# Allegro board XR808ST0_REF2_SIMPLE_V1_0-20191018.brd
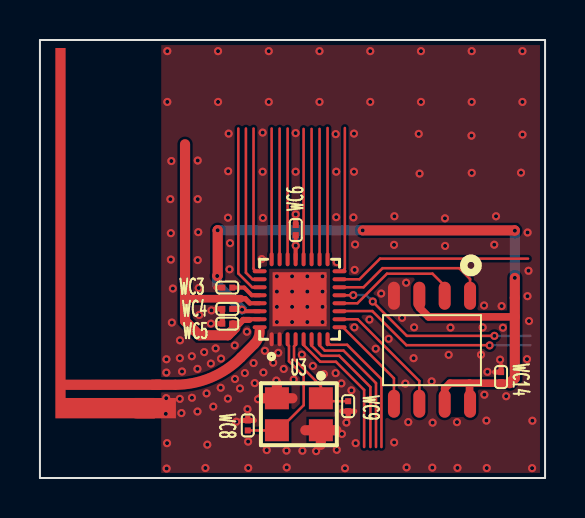
[diagram p0: board, top side]
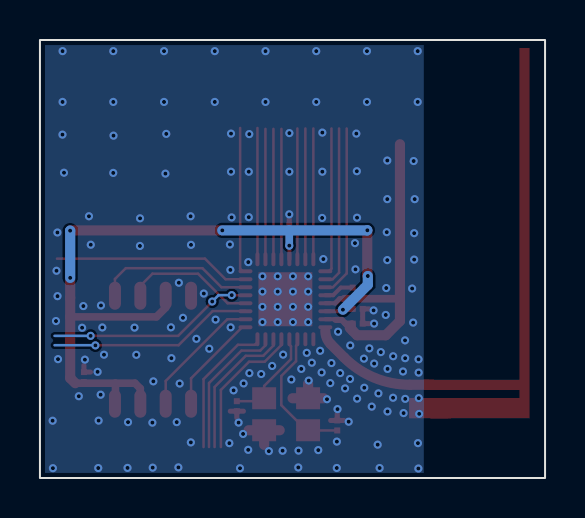
[diagram p1: board, bottom side, seen from below]

Outline 25.29 x 21.9 mm; copper layers: TOP, BOTTOM. Coordinates in mm from the lower left corner of the outline.
Outline path: rectangle 0,0 25.29,21.9

## Placement (name value [footprint] x y rotation side)
JW1  ANT-F  [ANT2B18_54X5_30]  5.82 4.66 90 top
U1  XR808ST  [QFN32P0_4B4_00X4_00H0_75]  13 8.94 90 top
U3  40MHz-E3SB40MHz  [CRY-TSX3225]  12.96 3.19 270 top
U4  SPI_NOR_16Mb  [SOP8_150MIL]  19.63 6.39 270 top
WC3  1uF  [C0201]  9.38 9.52 0 top
WC4  1uF  [C0201]  9.38 8.46 180 top
WC5  1uF  [C0201]  9.38 7.72 180 top
WC6  NC-104  [C0201]  12.81 12.4 90 top
WC8  NC-10pF  [C0201]  10.4 2.63 270 top
WC9  NC-10pF  [C0201]  15.43 3.59 270 top
WC14  NC-104  [C0201]  23.09 5.05 270 top

## Library data of the parts
JW1 = ANT-F_1
U1 = XR808ST0
U3 = Crystal4Pin_0
U4 = SPI-NOR-SO8
WC3-WC6 WC9 = CAPACITOR
WC8 WC14 = CAPACITOR_0

## Footprints (pads in the part's own frame, mm; a bottom-side part is the same pattern mirrored in y, then rotated)
ANT2B18_54X5_30
  rect 1.016x1.016 smd: 1(-1.168,0.577)
  rect 0.508x0.508 smd: 2(0,0)
C0201
  rect 0.3x0.3 smd: 1(-0.25,0) 2(0.25,0)
CRY-TSX3225
  rect 1.1x1.2 smd: 1(-0.8,1.1) 2(-0.8,-1.1) 3(0.8,-1.1) 4(0.8,1.1)
QFN32P0_4B4_00X4_00H0_75
  oval 0.7x0.2 smd: 1(-2,1.4) 2(-2,1) 3(-2,0.6) 4(-2,0.2) 5(-2,-0.2) 6(-2,-0.6) 7(-2,-1) 8(-2,-1.4) 17(2,-1.4) 18(2,-1) 19(2,-0.6) 20(2,-0.2) 21(2,0.2) 22(2,0.6) 23(2,1) 24(2,1.4)
  oval 0.2x0.7 smd: 9(-1.4,-2) 10(-1,-2) 11(-0.6,-2) 12(-0.2,-2) 13(0.2,-2) 14(0.6,-2) 15(1,-2) 16(1.4,-2) 25(1.4,2) 26(1,2) 27(0.6,2) 28(0.2,2) 29(-0.2,2) 30(-0.6,2) 31(-1,2) 32(-1.4,2)
  rect 2.7x2.7 smd: 33(0,0)
SOP8_150MIL
  oval 1.4x0.6 smd: 1(-2.725,1.905) 2(-2.725,0.635) 3(-2.725,-0.635) 4(-2.725,-1.905) 5(2.675,-1.905) 6(2.675,-0.635) 7(2.675,0.635) 8(2.675,1.905)

## Nets
GND: JW1.1(A) U1.1(GND1) U1.2(GND2) U1.33(EPAD) U3.2 U3.4(5) U4.4(VSS) WC3.1 WC4.2 WC5.2 WC6.2 WC8.1 WC9.2 WC14.1
VCC-BAT: U1.29(VDD_EXT) U1.31(VBAT) WC5.1
VDD-ANA: U1.21(VDD_IO) U1.30(VDD_ANA) U4.3(WP#) U4.7(HOLD#) U4.8(VCC) WC4.1 WC6.1 WC14.2
ANT: JW1.2(G) U1.32(ANT)
CHIP-PWD: U1.27(CHIP_PWD)
HXTAL1: U1.4(HXTAL1) U3.1 WC9.1
HXTAL2: U1.3(HXTAL2) U3.3 WC8.2
PA0: U1.7(PA00/TWI1_SCL/EINTA0)
PA1: U1.8(PA01/TWI1_SDA/EINTA1/PA18/TWI0_)
PA07: U1.20(PA07/UART1_TX/TWI0_SDA/EINTA7/P)
PA10: U1.23(PA10/ADC_CH0/PWM2/ECT2/EINTA10)
PA11: U1.22(PA11/ADC_CH1/PWM3/ECT3/EINTA11)
PA12: U1.26(LXTAL1/PA12/ADC_CH2/PWM4/ECT4/I)
PA13: U1.25(LXTAL2/PA13/ADC_CH3/PWM5/ECT5/U)
PA14: U1.24(PA14/ADC_CH4/PWM6/ECT6/UART1_RX)
PA19: U1.19(PA19/WUPIO5/UART2_RTS/TWI0_SCL/)
PA20: U1.18(PA20/WUPIO6/UART2_CTS/TWI0_SDA/)
PA21: U1.17(PA21/WUPIO7/UART2_RX/PWM2/ECT2/)
PA22: U1.16(PA22/WUPIO8/UART2_TX/PWM3/ECT3/)
PA23: U1.15(PA23/WUPIO9/TEST/EXT_DCDC_PUP/E)
PB2: U1.13(PB02/SWD_TMS/JTAG_TDO/PWM6/ECT6)
PB3: U1.11(PB03/SWD_TCK/JTAG_TDI/PWM7/ECT7)
SPI-CLK: U1.10(PB07/UART1_RTS/FLASH_CLK/EINTB7) U4.6(CLK)
SPI-CS: U1.14(PB06/UART1_CTS/FLASH_CS/EINTB6) U4.1(CS#)
SPI-MISO: U1.12(PB05/UART1_RX/FLASH_MISO/EINTB5) U4.2(MISO)
SPI-MOSI: U1.9(PB04/UART1_TX/FLASH_MOSI/EINTB4) U4.5(MOSI)
UART0-RX: U1.6(PB01/UART0_RX/JTAG_TCK/PWM5/ECT)
UART0-TX: U1.5(PB00/UART0_TX/JTAG_TMS/PWM4/ECT)
N17121025: U1.28(VDD_DIG) WC3.2

## Via types
v1: diameter 0.406, hole 0.203, TOP to BOTTOM, 188 vias

## Routing (per net, layer and track width the routed paths; a pad name or vN(x,y) marks a point on that pad's centre or on a via; arc(x,y) is an arc through that point)
GND: length 9.2
  TOP w0.254: 15.1,3.34 WC9.2 ; WC9.2 15.43,3.01 ; WC9.2 15.76,3.34 ; 8.8,8.46 WC4.2 9.13,8.13 ; 8.8,9.52 WC3.1 ; WC6.2 12.81,12.97 ; 10.08,2.88 WC8.1 ; WC8.1 10.4,3.21 ; WC8.1 10.73,2.88 ; 9.13,8.05 WC5.2 8.8,7.72 ; 23.09,5.62 WC14.1 22.76,5.3
  TOP w0.508: U3.4 14.84,2.39 ; U3.4 14.06,1.66 ; U3.4 13.29,2.39 ; U3.2 12.64,3.99 ; U3.2 11.86,4.72 ; U3.2 11.09,3.99
  vias: v1(6.33,5.94) v1(6.33,5.27) v1(6.32,3.99) v1(6.3,3.21) v1(6.34,0.47) v1(6.38,21.35) v1(6.38,18.81) v1(6.36,1.74) v1(6.53,13.94) v1(6.58,15.85) v1(6.55,12.24) v1(6.55,10.92) v1(6.6,7.77) v1(6.65,9.47) v1(7.01,6.88) v1(7,5.99) v1(7,3.96) v1(7.11,5.33) v1(7.08,3.25) v1(7.6,6.09) v1(7.61,4.01) v1(7.9,15.88) v1(7.9,13.94) v1(7.92,12.29) v1(7.9,10.9) v1(7.89,5.46) v1(7.89,3.32) v1(7.95,9.5) v1(7.98,8.15) v1(8.22,6.29) v1(8.34,4.23) v1(8.28,0.5) v1(8.38,1.67) v1(8.59,8.38) v1(8.56,7.72) v1(8.56,5.72) v1(8.68,3.57) v1(8.8,6.48) v1(8.92,21.35) v1(8.92,18.81) v1(9.07,5.97) v1(9.05,4.51) v1(9.45,17.22) v1(9.42,15.34) v1(9.41,13.02) v1(9.41,3.97) v1(9.52,11.74) v1(9.49,10.43) v1(9.75,6.63) v1(9.76,4.95) v1(9.83,2.82) v1(10.01,4.48) v1(10.26,5.25) v1(10.36,7.32) v1(10.39,3.45) v1(10.42,1.82) v1(10.43,0.5) v1(10.7,5.75) v1(10.75,4.75) v1(10.92,3.94) v1(11.1,10.95) v1(11.15,17.27) v1(11.15,15.32) v1(11.16,13) v1(11.19,5.28) v1(11.26,6.36) v1(11.35,1.4) v1(11.46,21.35) v1(11.46,18.81) v1(11.68,5.76) v1(11.83,4.87) v1(11.86,10.08) v1(11.86,9.32) v1(11.86,8.56) v1(11.86,7.8) v1(11.93,6.26) v1(12.21,5.46) v1(12.34,1.37) v1(12.36,0.53) v1(12.62,10.08) v1(12.62,9.32) v1(12.62,8.56) v1(12.62,7.8) v1(12.7,4.93) v1(12.8,17.25) v1(12.8,15.32) v1(12.81,13.18) v1(13.11,6.17) v1(13.14,1.36) v1(13.39,10.08) v1(13.39,9.32) v1(13.39,8.56) v1(13.39,7.8) v1(13.66,5.6) v1(13.83,1.34) v1(14,21.35) v1(14,18.81) v1(14.15,10.08) v1(14.15,9.32) v1(14.15,8.56) v1(14.15,7.8) v1(14.21,5.2) v1(14.81,17.2) v1(14.83,15.32) v1(14.83,13.04) v1(14.8,5.24) v1(14.86,10.79) v1(14.86,1.41) v1(15.09,4.73) v1(15.12,2.2) v1(15.34,2.77) v1(15.27,0.49) v1(15.59,4.38) v1(15.72,17.22) v1(15.72,15.32) v1(15.69,13.03) v1(15.74,7.53) v1(15.78,11.68) v1(15.75,10.41) v1(15.81,1.74) v1(16.54,21.35) v1(16.54,18.81) v1(16.5,7.92) v1(16.81,6.46) v1(17.08,9.22) v1(17.46,6.96) v1(17.75,13.09) v1(17.73,11.66) v1(17.73,1.78) v1(18.13,8.01) v1(18.33,9.76) v1(18.29,4.72) v1(18.44,2.79) v1(18.36,0.53) v1(18.73,7.53) v1(18.71,5.99) v1(18.96,17.21) v1(19.01,15.22) v1(19.08,21.35) v1(19.08,18.81) v1(19.61,4.83) v1(19.64,0.52) v1(19.66,2.77) v1(20.28,12.98) v1(20.28,11.6) v1(20.46,6.16) v1(20.55,7.52) v1(20.88,2.79) v1(20.9,0.5) v1(21.62,21.35) v1(21.62,18.81) v1(21.61,17.12) v1(21.62,15.26) v1(22.08,6.17) v1(22.23,8.63) v1(22.17,7.53) v1(22.25,4.17) v1(22.4,5.31) v1(22.35,2.87) v1(22.37,0.5) v1(22.74,11.67) v1(22.83,13.09) v1(23.04,5.92) v1(23.12,8.6) v1(23.18,7.51) v1(23.34,4.09) v1(24.08,15.27) v1(24.16,21.35) v1(24.16,18.81) v1(24.16,17.17) v1(24.42,12.28) v1(24.41,9.09) v1(24.38,5.94) v1(24.46,10.36) v1(24.49,7.85) v1(24.64,0.49) v1(24.65,2.86)
VCC-BAT: length 17.9
  TOP w0.203: 10.51,8.74 U1.29 ; U1.31 10.52,7.94 10.49,7.9
  TOP w0.254: 10.51,8.74 10.28,8.97 10.06,8.97
  TOP w0.305: 9.99,7.72 9.67,7.72 9.83,7.56 ; 9.99,7.72 10.18,7.9 10.49,7.9 ; 9.99,7.72 9.83,7.56 ; 9.83,7.56 9.8,7.52 ; 9.63,7.36 WC5.1
  TOP w0.381: 7.26,8.97 10.06,8.97 ; 9.8,7.52 9.78,7.51
  TOP w0.508: 9.78,7.51 9.41,7.14 7.98,7.14 7.26,7.85 7.26,16.69
VDD-ANA: length 41.3
  TOP w0.203: WC6.1 12.81,11.62 v1(12.81,11.62) 12.81,11.57 12.8,11.57 U1.21 ; v1(10.12,8.42) 10.2,8.34 U1.30
  TOP w0.305: WC4.1 10.08,8.46 v1(10.12,8.42) ; WC14.2 23.09,4.74 23.09,4.74 ; 23.75,8.99 23.77,9.01
  TOP w0.381: U4.8 21.51,3.74 21.51,4.74 ; U4.7 20.26,4.47 20.53,4.74 21.51,4.74 ; 23.52,4.74 21.51,4.74 ; U4.3 18.99,8.52 19.45,8.06 23.77,8.06
  TOP w0.508: v1(16.16,12.38) 23.77,12.38 v1(23.78,12.37) ; v1(23.77,10.01) 23.77,4.99 23.52,4.74 ; v1(8.9,12.39) 8.9,12.38 8.9,10.13 v1(8.87,10.1)
  BOTTOM w0.381: v1(12.81,11.62) 12.81,12.38
  BOTTOM w0.508: v1(8.9,12.39) 8.9,12.38 v1(16.16,12.38) ; v1(10.12,8.42) 8.87,9.66 v1(8.87,10.1) ; v1(23.78,12.37) 23.77,12.36 v1(23.77,10.01)
ANT: length 6.5
  TOP w0.127: 11,7.35 U1.32
  TOP w0.508: JW1.2 6.77,4.66 arc(8.55,5.02) 10.06,6.02 10.73,6.69 arc(10.93,7) 11,7.35
CHIP-PWD: length 8.6
  TOP w0.127: U1.27 10.62,9.54 9.93,10.23 9.93,17.48
HXTAL1: length 5
  TOP w0.127: U1.4 12.8,6.67 12.72,6.59 12.72,5.95 14.06,4.6 U3.1 14.21,3.84 WC9.1
HXTAL2: length 7
  TOP w0.127: U1.3 12.4,6.67 12.47,6.61 12.47,5.84 13.2,5.1 13.2,3.64 11.95,2.39 U3.3 11.85,2.38 WC8.2
PA0: length 7.1
  TOP w0.127: 16.82,1.55 16.82,4.75 15.2,6.37 14.26,6.37 14,6.63 U1.7
PA1: length 7
  TOP w0.127: U1.8 14.4,6.79 14.53,6.66 15.38,6.66 17.1,4.94 17.1,1.55
PA07: length 6.5
  TOP w0.127: U1.20 13.2,17.46
PA10: length 6.5
  TOP w0.127: U1.23 12,17.48
PA11: length 6.5
  TOP w0.127: U1.22 12.4,17.48
PA12: length 8
  TOP w0.127: U1.26 10.64,9.94 10.31,10.26 10.31,17.48
PA13: length 7.4
  TOP w0.127: U1.25 10.82,10.34 10.69,10.47 10.69,17.48
PA14: length 6.5
  TOP w0.127: U1.24 11.6,17.48
PA19: length 6.5
  TOP w0.127: U1.19 13.6,17.46
PA20: length 6.5
  TOP w0.127: U1.18 14,17.46
PA21: length 6.6
  TOP w0.127: U1.17 14.4,17.5
PA22: length 7.4
  TOP w0.127: 15.27,17.5 15.27,10.47 15.14,10.34 U1.16
PA23: length 9.9
  TOP w0.127: U1.15 16,9.94 17.03,10.97 24.43,10.97
PB2: length 10.4
  TOP w0.127: U1.13 15.66,9.14 15.66,9.14 v1(15.69,9.14) ; v1(16.66,8.83) 16.66,8.81 18.37,7.11 v1(22.75,7.11)
  BOTTOM w0.127: v1(15.69,9.14) 16.35,9.14 v1(16.66,8.83) ; v1(22.75,7.11) 24.56,7.11
PB3: length 10.3
  TOP w0.127: v1(22.51,6.63) 22.5,6.64 18.35,6.64 16.64,8.35 15.01,8.35 U1.11
  BOTTOM w0.127: 24.56,6.64 22.52,6.64 v1(22.51,6.63)
SPI-CLK: length 6.4
  TOP w0.127: U4.6 18.99,4.85 15.91,7.94 U1.10
SPI-CS: length 8
  TOP w0.127: U4.1 21.53,9.95 20.99,10.49 17.16,10.49 16.2,9.54 U1.14
SPI-MISO: length 6.6
  TOP w0.127: U4.2 20.26,9.61 19.65,10.22 17.37,10.22 15.9,8.74 U1.12
SPI-MOSI: length 5.1
  TOP w0.127: U1.9 15.17,7.54 17.72,4.98 U4.5
UART0-RX: length 7.1
  TOP w0.127: U1.6 13.6,6.62 14.11,6.11 14.98,6.11 16.55,4.55 16.55,1.55
UART0-TX: length 7.1
  TOP w0.127: 16.23,1.55 16.23,4.4 14.82,5.81 14.04,5.81 13.2,6.65 U1.5
N17121025: length 1.5
  TOP w0.203: WC3.2 10.23,9.52 10.61,9.14 U1.28

## Copper pours and planes (outline as drawn; the poured copper is in the pictures)
GND on TOP (solid shape): 6.81,2.99 4.83,2.99 4.83,4 6.81,4
GND on TOP: 0.25,0.25 0.25,21.65 25.03,21.65 25.03,0.25 ; 3 cut-outs
GND on BOTTOM: 5.68,0.25 5.68,21.65 25.03,21.65 25.03,0.25
Net_34 on TOP (solid shape): 1.28,4.92 6.07,4.92 6.07,4.41 1.28,4.41 1.28,4 5.75,4 5.75,2.99 0.77,2.99 0.77,21.5 1.28,21.5

## Text on the board
NCLEGEND-1-2: FIGURE | SIZE | 8.0 | 15.75 | DRILL CHART: TOP to BOTTOM | ALL UNITS ARE IN MILS | PLATED | QTY | 203 | 26
